# EAGLE board teensyBoard_1.0.1 (EAGLE 6.6.0)
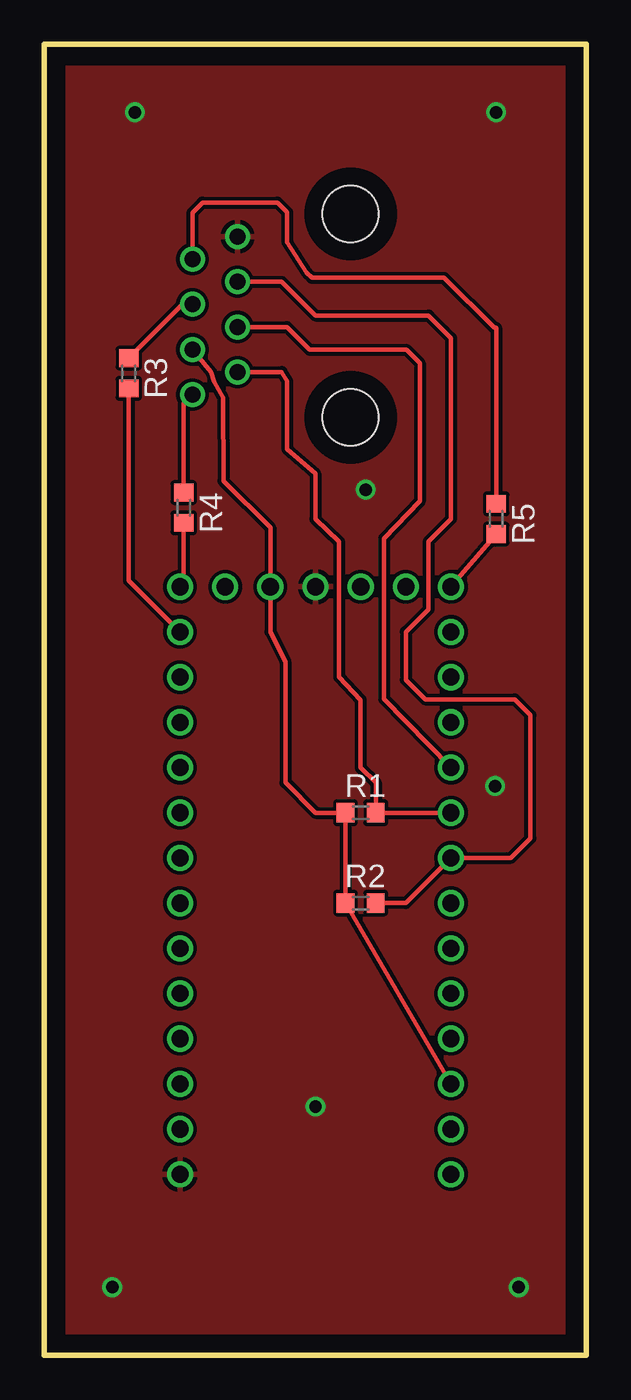
[diagram p0: board, top side]
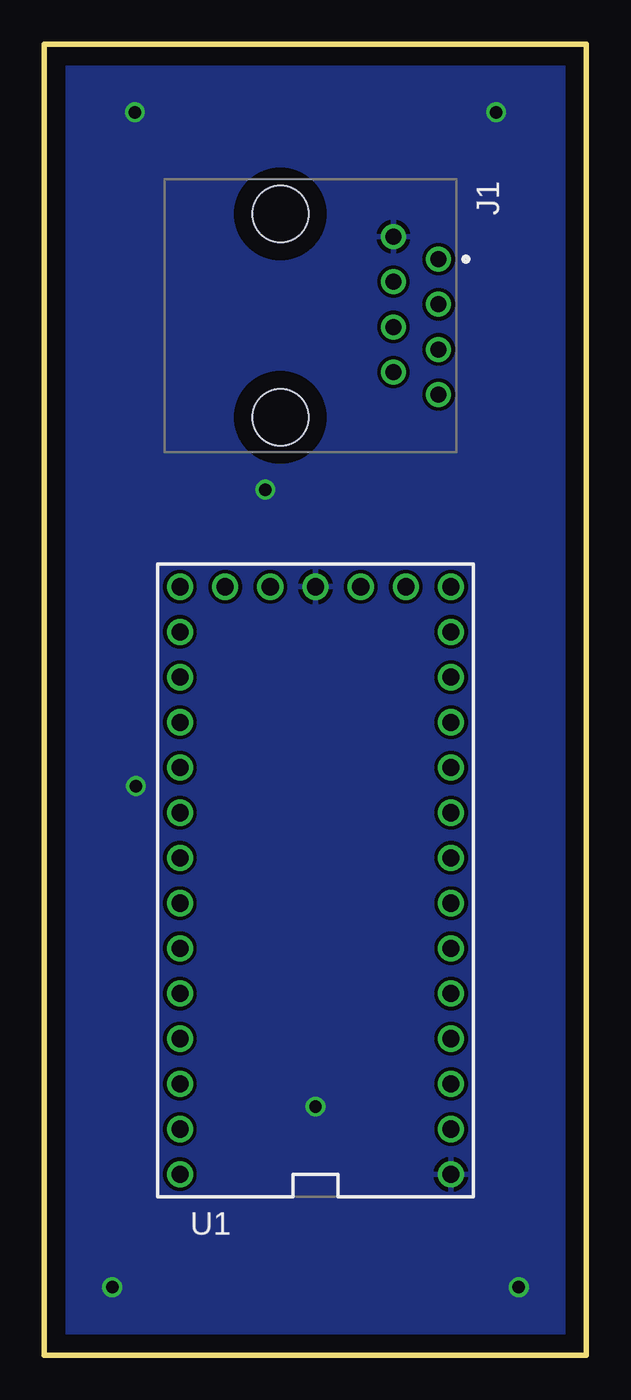
[diagram p1: board, bottom side, seen from below]

Size 30.48 x 73.66 mm. Coordinates in mm from the lower left corner, seen from the top.
Outline: 0,0 0,73.66 30.48,73.66 30.48,0 0,0
Copper layers (1*16): Top 0.035mm / dielectric 1.5mm / Bottom 0.035mm
Design rules "default": minimum track width 10mil, minimum drill 24mil, track to track 8mil, track to pad 8mil, pad to pad 8mil, via to via 8mil, smd to smd 8mil, copper to edge 40mil, drill to drill 8mil, minimum pad ring 10mil, minimum via ring 8mil, stop-mask expansion 4mil, vias tented up to drill 0mil, thermal gap 10mil

## Footprints (pad centres in the part's own frame; a part is rotated, then mirrored left to right if it is on the bottom)
MJACK8P8C = drill 0.9: 1 -3.175,5.649; 2 -0.635,5.649; 3 1.905,5.649; 4 4.445,5.649; 5 -4.445,3.109; 6 -1.905,3.109; 7 0.635,3.109; 8 3.175,3.109 | hole 3.17: -5.715,-3.241; 5.715,-3.241
R0603 = smd 1 x 1.1: 1 -0.85,0; 2 0.85,0
TEENSY_3.1_BASIC = drill 0.965: 0 -7.62,13.97; 1 -7.62,11.43; 2 -7.62,8.89; 3 -7.62,6.35; 3.3V 7.62,11.43; 3.3V1 -2.54,-16.51; 4 -7.62,3.81; 5 -7.62,1.27; 6 -7.62,-1.27; 7 -7.62,-3.81; 8 -7.62,-6.35; 9 -7.62,-8.89; 10 -7.62,-11.43; 11 -7.62,-13.97; 12 -7.62,-16.51; 13 7.62,-16.51; 14/A0 7.62,-13.97; 15/A1 7.62,-11.43; 16/A2 7.62,-8.89; 17/A3 7.62,-6.35; 18/A4 7.62,-3.81; 19/A5 7.62,-1.27; 20/A6 7.62,1.27; 21/A7 7.62,3.81; 22/A8 7.62,6.35; 23/A9 7.62,8.89; A14 5.08,-16.51; AGND 7.62,13.97; GND -7.62,16.51; GND1 0,-16.51; PGM 2.54,-16.51; VBAT -5.08,-16.51; VIN 7.62,16.51

## Placement (x,y rotation side)
J1  MJACK8P8CVERT  [MJACK8P8C]  13.97,58.42 270 bottom
R1  4k7  [R0603]  17.78,30.48 0 top
R2  4k7  [R0603]  17.78,25.4 0 top
R3  50  [R0603]  4.74,55.18 270 top
R4  50  [R0603]  7.84,47.62 270 top
R5  50  [R0603]  25.4,46.99 270 top
U1  TEENSY_3.1_BASIC  [TEENSY_3.1_BASIC]  15.24,26.67 180 bottom

## Library data of the parts
J1 = wavemeter
R1-R5 = resistor
U1 = mcu-accessories

## Nets
AGND: U1.AGND
GND: J1.5 U1.GND U1.GND1
N$2: R3.2 U1.11
N$3: J1.6 R2.2 U1.19/A5
N$4: J1.4 R4.1
N$5: R4.2 U1.12
N$6: J1.1 R5.1
N$7: R5.2 U1.13
N$8: J1.8 R1.2 U1.18/A4
N$9: J1.7 U1.17/A3
N$10: J1.2 R3.1
VBAT: U1.VBAT
VDD: J1.3 R1.1 R2.1 U1.3.3V U1.3.3V1
VIN: U1.VIN

## Tracks (layer width: path | path; a pad name or v marks a point on that pad's centre or on a via)
GND  (via drill 0.7)
  other vias: 15.24,13.97 5.08,69.85 25.4,69.85 3.81,3.81 26.67,3.81 25.34,31.98 18.06,48.64
  pour Top: 29.21,1.27 1.27,1.27 1.27,72.39 29.21,72.39
  pour Bottom: 1.27,72.39 29.21,72.39 29.21,1.27 1.27,1.27
N$2
  Top 0.254: R3.2 4.74,43.52 U1.11
N$3
  Top 0.254: R2.2 20.32,25.4 U1.19/A5 26.23,27.94 27.33,29.05 27.33,35.97 26.44,36.85 21.41,36.85 20.32,37.95 20.32,40.64 21.59,41.91 21.59,45.72 22.86,46.99 22.86,57.16 22.47,57.56 22.45,57.56 21.59,58.42 15.24,58.42 13.34,60.33 J1.6
N$4
  Top 0.254: J1.4 7.84,53.49 R4.1
N$5
  Top 0.254: R4.2 7.84,43.18 U1.12
N$6
  Top 0.254: J1.1 8.32,64.2 8.89,64.77 13.09,64.77 13.64,64.22 13.64,62.56 14.74,60.85 15.04,60.55 22.47,60.55 25.29,57.73 25.39,57.73 25.4,57.72 R5.1
N$7
  Top 0.254: R5.2 U1.13
N$8
  Top 0.254: U1.18/A4 R1.2 18.63,32.17 17.78,33.02 17.78,36.83 16.57,38.1 16.57,45.72 15.24,46.99 15.24,49.53 13.65,50.93 13.65,54.74 13.34,55.24 J1.8
N$9
  Top 0.254: J1.7 13.63,57.78 14.91,56.5 20.34,56.5 21.11,55.74 21.11,47.99 19.1,45.9 19.1,36.87 U1.17/A3
N$10
  Top 0.254: J1.2 7.76,59.05 R3.1
VDD
  Top 0.254: U1.3.3V R2.1 R1.1 15.24,30.48 13.55,32.17 13.55,38.96 12.7,40.64 U1.3.3V1 12.7,46.49 10.07,49.12 10.03,53.81 9.54,54.7 9.37,55.23 J1.3